# Altium PCB 175-00060, rev2, PCB, NRES RTD_TEC Board.PcbDoc (part 2 of 4)
Units mm, origin at the board's own origin, x right, y up, seen from the top; angles counter-clockwise.
Board outline 188.3 x 85 mm, 8 copper layers (Top Layer (*.GTL), MidLayer1 (*.G1), InternalPlane1 (*.GP1), InternalPlane2 (*.GP2), InternalPlane3 (*.GP3), InternalPlane4 (*.GP4), MidLayer2 (*.G2), Bottom Layer (*.GBL)), stack 1.748 mm thick; 256 components, 199 nets, 1067 pads, 575 vias.
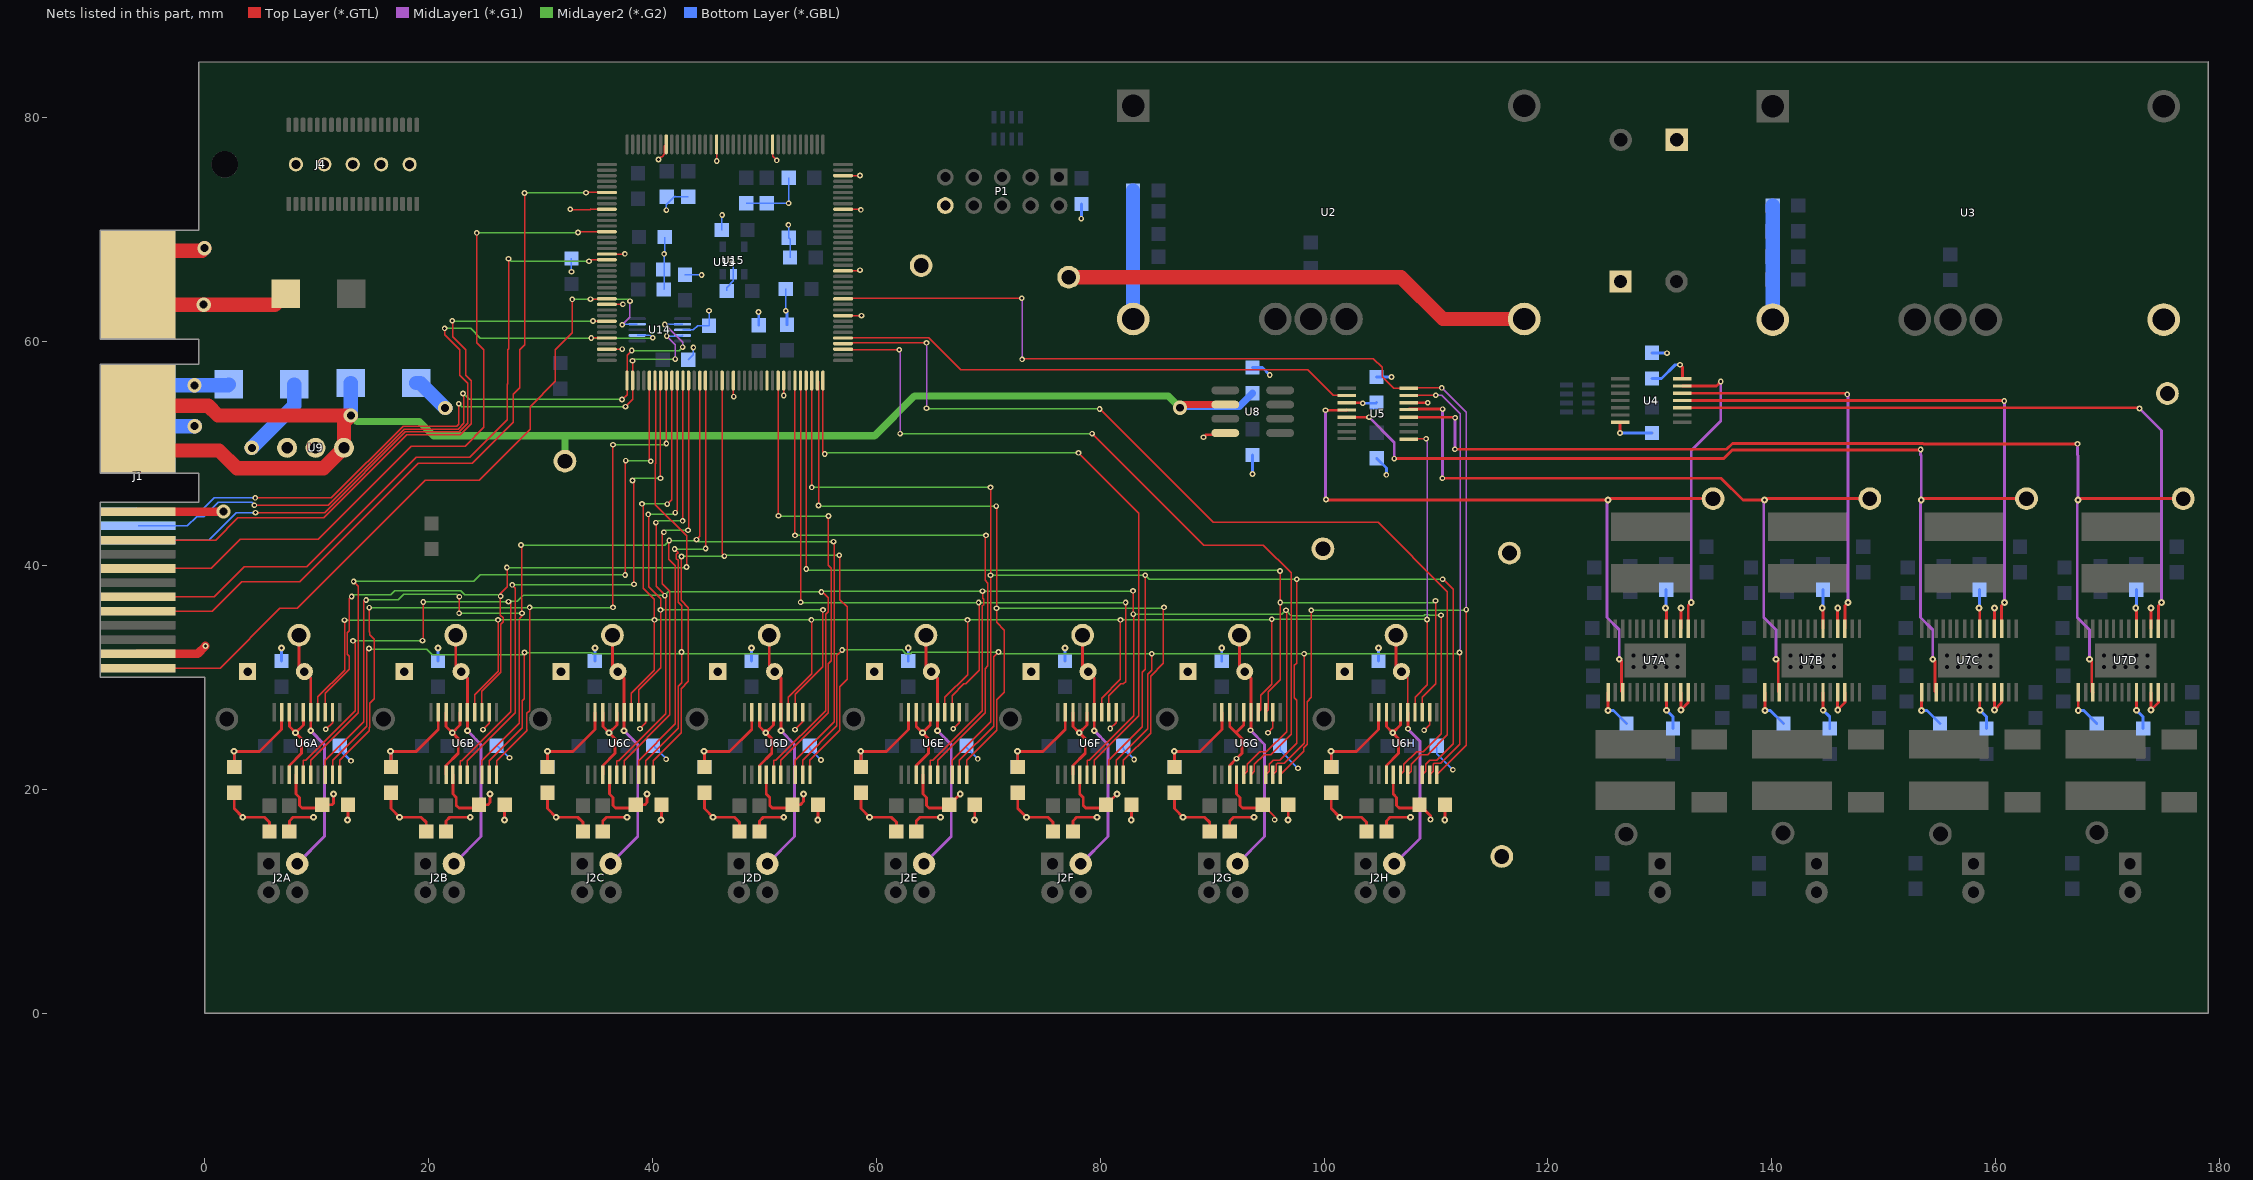
[diagram p8: the nets of this part, all layers, seen from the top]

## Via types
v1: diameter 0.508, hole 0.254, Top Layer (*.GTL) to Bottom Layer (*.GBL), tented both sides, 324 vias
v2: diameter 0.61, hole 0.254, Top Layer (*.GTL) to Bottom Layer (*.GBL), tented both sides, 234 vias
v3: diameter 1.27, hole 0.711, Top Layer (*.GTL) to Bottom Layer (*.GBL), 17 vias

## Nets (pads, with @x,y where several pads share a name; then routed paths per layer and width w, separated by ;. In a path a pad name is that pad's centre, name@x,y a point inside that pad or via, vN(x,y) a via of type N, cw(c..) or ccw(c..) an arc to the next point about the centre after c; other vN are vias at no path point) (continued)
+5ANA: C13.2 C15A.2 C15B.2 C15C.2 C15D.2 C15E.2 C15F.2 C15G.2 C15H.2 C34.POS TP7.1 U5.3 U6A.14 U6B.14 U6C.14 U6D.14 U6E.14 U6F.14 U6G.14 U6H.14 U9.3 | length 64.8
  Top Layer (*.GTL) w0.127: C15G.2@94.516,18.618 95.58,17.554 v1(95.58,17.272)
  Top Layer (*.GTL) w0.254: U6A.14@8.174,21.311 8.174,19.577 8.484,19.267 8.484,18.542 8.712,18.313 10.211,18.313 C15A.2@10.516,18.618 11.379,18.618 11.506,18.745 v2(11.506,19.583) ; U6B.14@22.174,21.311 22.174,19.577 22.484,19.267 22.484,18.542 22.712,18.313 24.211,18.313 C15B.2@24.516,18.618 25.324,18.618 25.506,18.801 v2(25.506,19.583) ; U6C.14@36.174,21.311 36.174,19.577 36.484,19.267 36.484,18.542 36.712,18.313 38.211,18.313 C15C.2@38.516,18.618 39.319,18.618 39.506,18.805 v2(39.506,19.583) ; U6D.14@50.174,21.311 50.174,19.577 50.484,19.267 50.484,18.542 50.712,18.313 52.211,18.313 C15D.2@52.516,18.618 53.213,18.618 53.506,18.911 v2(53.506,19.583) ; U6E.14@64.174,21.311 64.174,19.577 64.484,19.267 64.484,18.542 64.712,18.313 66.211,18.313 C15E.2@66.516,18.618 66.541,18.618 v2(67.506,19.583) ; U6F.14@78.174,21.311 78.174,19.577 78.484,19.267 78.484,18.542 78.712,18.313 80.211,18.313 C15F.2@80.516,18.618 80.541,18.618 v2(81.506,19.583) ; U6G.14@92.174,21.311 92.174,19.577 92.484,19.267 92.484,18.542 92.712,18.313 94.211,18.313 C15G.2@94.516,18.618 C15G.2@94.541,18.618 ; U5.3@102.006,54.523 103.414,54.523 v1(103.454,54.483) ; U6H.14@106.174,21.311 106.174,19.577 106.484,19.267 106.484,18.542 106.712,18.313 108.211,18.313 C15H.2@108.516,18.618 109.499,17.634 v1(109.499,17.297)
  Bottom Layer (*.GBL) w0.254: v1(103.454,54.483) 104.623,54.483 C13.2@104.673,54.534
  Bottom Layer (*.GBL) w1.27: v3(4.216,50.495) 8.001,54.28 C34.POS@8.001,56.159
+5VTEC1: C5.1 C12.1 C22A.2 C22B.2 C23A.2 C23B.2 C24A.2 C24B.2 TP1.1 U2.6 U4.14 U7A.1 U7A.9 U7A.11 U7A.12 U7A.18 U7A.20 U7B.1 U7B.9 U7B.11 U7B.12 U7B.18 U7B.20 | length 78.5
  Top Layer (*.GTL) w0.254: U7A.1@125.375,28.648 125.375,27.033 v2(125.377,27.031) ; v2(130.508,36.175) 130.575,36.108 U7A.20@130.575,34.348 ; U7A.9@130.575,28.648 130.575,27.065 v2(130.584,27.056) ; v1(131.801,57.912) 132.004,57.709 U4.14@132.004,56.672 ; U7A.11@131.875,28.648 v2@131.875,27.086 ; U7A.18@131.875,34.348 131.875,36.17 v2(131.88,36.175) ; v2(131.88,27.081) v2@131.875,27.086 ; U7A.12@132.525,28.648 132.525,27.736 v2@131.875,27.086 ; U7B.1@139.375,28.648 139.375,27.033 v2(139.377,27.031) ; v2(144.508,36.175) 144.575,36.108 U7B.20@144.575,34.348 ; U7B.9@144.575,28.648 144.575,27.065 v2(144.584,27.056) ; U7B.11@145.875,28.648 v2@145.875,27.086 ; U7B.18@145.875,34.348 145.875,36.17 v2(145.88,36.175) ; v2(145.88,27.081) v2@145.875,27.086 ; U7B.12@146.525,28.648 146.525,27.736 v2@145.875,27.086
  Top Layer (*.GTL) w1.27: TP1.1@77.191,65.735 106.883,65.735 110.618,62 U2.6@117.875,62
  Bottom Layer (*.GBL) w0.254: v2(125.377,27.031) 125.86,27.031 C23A.2@127.028,25.862 ; C12.1@129.286,56.693 130.15,56.693 131.369,57.912 v1(131.801,57.912) ; v2(130.508,36.175) 130.559,36.225 C22A.2@130.559,37.826 ; v2(130.584,27.056) 131.168,26.472 C24A.2@131.168,25.43 ; v2(139.377,27.031) 139.86,27.031 C23B.2@141.028,25.862 ; v2(144.508,36.175) 144.559,36.225 C22B.2@144.559,37.826 ; v2(144.584,27.056) 145.168,26.472 C24B.2@145.168,25.43
+5VTEC2: C10.1 C22C.2 C22D.2 C23C.2 C23D.2 C24C.2 C24D.2 TP3.1 U3.6 U7C.1 U7C.9 U7C.11 U7C.12 U7C.18 U7C.20 U7D.1 U7D.9 U7D.11 U7D.12 U7D.18 U7D.20 | length 31.9
  Top Layer (*.GTL) w0.254: U7C.1@153.375,28.648 153.375,27.033 v2(153.377,27.031) ; v2(158.508,36.175) 158.575,36.108 U7C.20@158.575,34.348 ; U7C.9@158.575,28.648 158.575,27.065 v2(158.584,27.056) ; U7C.11@159.875,28.648 v2@159.875,27.086 ; U7C.18@159.875,34.348 159.875,36.17 v2(159.88,36.175) ; v2(159.88,27.081) v2@159.875,27.086 ; U7C.12@160.525,28.648 160.525,27.736 v2@159.875,27.086 ; U7D.1@167.375,28.648 167.375,27.033 v2(167.377,27.031) ; v2(172.508,36.175) 172.575,36.108 U7D.20@172.575,34.348 ; U7D.9@172.575,28.648 172.575,27.065 v2(172.584,27.056) ; U7D.11@173.875,28.648 v2@173.875,27.086 ; U7D.18@173.875,34.348 173.875,36.17 v2(173.88,36.175) ; v2(173.88,27.081) v2@173.875,27.086 ; U7D.12@174.525,28.648 174.525,27.736 v2@173.875,27.086
  Bottom Layer (*.GBL) w0.254: v2(153.377,27.031) 153.86,27.031 C23C.2@155.028,25.862 ; v2(158.508,36.175) 158.559,36.225 C22C.2@158.559,37.826 ; v2(158.584,27.056) 159.168,26.472 C24C.2@159.168,25.43 ; v2(167.377,27.031) 167.86,27.031 C23D.2@169.028,25.862 ; v2(172.508,36.175) 172.559,36.225 C22D.2@172.559,37.826 ; v2(172.584,27.056) 173.168,26.472 C24D.2@173.168,25.43
+12V: C29.1 C33.POS J1.P3 TP4.1 U8.2 U9.1 | length 137.1
  Top Layer (*.GTL) w0.635: v3(87.122,54.077) 87.401,54.356 U8.2@91.174,54.356
  Top Layer (*.GTL) w1.27: J1.P3@-5.95,53.063 -3.154,50.267 1.295,50.267 2.896,48.666 10.617,48.666 U9.1@12.446,50.495 12.446,52.781 v3(13.056,53.391) 1.194,53.391 0.33,54.254 -4.759,54.254 J1.P3@-5.95,53.063
  MidLayer2 (*.G2) w0.635: v3(13.056,53.391) 13.614,52.832 19.202,52.832 20.46,51.575 32.309,51.575 ; TP4.1@32.182,49.301 32.182,51.448 32.309,51.575 ; v3(87.122,54.077) 86.081,55.118 63.398,55.118 59.855,51.575 32.309,51.575
  Bottom Layer (*.GBL) w0.635: v3@87.122,54.102 v3(87.122,54.077) 87.249,54.204 92.431,54.204 C29.1@93.599,55.372
  Bottom Layer (*.GBL) w1.27: v3(13.056,53.391) C33.POS@13.056,56.286
+24V: C1.2 C2.2 C3.2 C4.2 C6.2 C7.2 C8.2 C9.2 C43.POS J1.P4 TP2.1 U2.2 U3.2 | length 43.3
  Top Layer (*.GTL) w1.27: v3(0,68.326) -0.232,68.094 -2.921,68.094 J1.P4@-5.95,65.065 -4.166,63.28 v3(-0.085,63.28) 6.257,63.28 C43.POS@7.239,64.262
  Bottom Layer (*.GBL) w1.27: C1.2@82.931,73.482 C4.2@82.931,71.628 C3.2@82.931,69.596 C2.2@82.931,67.564 82.931,62.019 U2.2@82.95,62 ; U3.2@140.075,61.95 140.081,61.956 C6.2@140.081,65.532 C7.2@140.081,67.564 C8.2@140.081,69.85 C9.2@140.081,72.136
A: C13.1 C14A.1 C14B.1 C14C.1 C14D.1 C14E.1 C14F.1 C14G.1 C14H.1 C15A.1 C15B.1 C15C.1 C15D.1 C15E.1 C15F.1 C15G.1 C15H.1 C17A.1 C17B.1 C17C.1 C17D.1 C17E.1 C17F.1 C17G.1 C17H.1 C19A.1 C19B.1 C19C.1 C19D.1 C19E.1 C19F.1 C19G.1 C19H.1 C20A.1 C20B.1 C20C.1 C20D.1 C20E.1 C20F.1 C20G.1 C20H.1 C29.2 C30.2 C31.2 C33.NEG C34.NEG J1.P1 R6A.1 R6B.1 R6C.1 R6D.1 R6E.1 R6F.1 R6G.1 R6H.1 TP10.1 TP11.1 U5.14 U6A.6 U6A.8 U6A.13 U6B.6 U6B.8 U6B.13 U6C.6 U6C.8 U6C.13 U6D.6 U6D.8 U6D.13 U6E.6 U6E.8 U6E.13 U6F.6 U6F.8 U6F.13 U6G.6 U6G.8 U6G.13 U6H.6 U6H.8 U6H.13 U8.4 U9.2 | length 191.4
  Top Layer (*.GTL) w0.254: C14A.1@2.642,19.685 2.642,18.263 v2(3.404,17.501) 5.334,17.501 5.791,17.043 C17A.1@5.791,16.231 ; C19A.1@7.569,16.231 7.569,17.17 7.899,17.501 v2(9.728,17.501) ; U6A.13@7.574,21.311 7.574,22.128 8.661,23.216 8.661,24.511 v2(8.128,25.044) ; U6A.8@7.574,26.861 7.574,25.598 v2(8.128,25.044) ; U6A.6@8.824,26.861 8.824,25.741 v2(8.128,25.044) ; v2(12.776,17.247) 12.802,17.272 C15A.1@12.802,18.618 ; C14B.1@16.642,19.685 16.642,18.263 v2(17.404,17.501) 19.334,17.501 19.791,17.043 C17B.1@19.791,16.231 ; C19B.1@21.569,16.231 21.569,17.17 21.899,17.501 v2(23.728,17.501) ; U6B.13@21.574,21.311 21.574,22.128 22.661,23.216 22.661,24.511 v2(22.128,25.044) ; U6B.8@21.574,26.861 21.574,25.598 v2(22.128,25.044) ; U6B.6@22.824,26.861 22.824,25.741 v2(22.128,25.044) ; v2(26.776,17.247) 26.802,17.272 C15B.1@26.802,18.618 ; C14C.1@30.642,19.685 30.642,18.263 v2(31.404,17.501) 33.334,17.501 33.791,17.043 C17C.1@33.791,16.231 ; C19C.1@35.569,16.231 35.569,17.17 35.899,17.501 v2(37.728,17.501) ; U6C.13@35.574,21.311 35.574,22.128 36.661,23.216 36.661,24.511 v2(36.128,25.044) ; U6C.8@35.574,26.861 35.574,25.598 v2(36.128,25.044) ; U6C.6@36.824,26.861 36.824,25.741 v2(36.128,25.044) ; v2(40.776,17.247) 40.802,17.272 C15C.1@40.802,18.618 ; C14D.1@44.642,19.685 44.642,18.263 v2(45.404,17.501) 47.334,17.501 47.791,17.043 C17D.1@47.791,16.231 ; C19D.1@49.569,16.231 49.569,17.17 49.899,17.501 v2(51.728,17.501) ; U6D.13@49.574,21.311 49.574,22.128 50.661,23.216 50.661,24.511 v2(50.128,25.044) ; U6D.8@49.574,26.861 49.574,25.598 v2(50.128,25.044) ; U6D.6@50.824,26.861 50.824,25.741 v2(50.128,25.044) ; v2(54.776,17.247) 54.802,17.272 C15D.1@54.802,18.618 ; C14E.1@58.642,19.685 58.642,18.263 v2(59.404,17.501) 61.334,17.501 61.791,17.043 C17E.1@61.791,16.231 ; C19E.1@63.569,16.231 63.569,17.17 63.899,17.501 v2(65.728,17.501) ; U6E.13@63.574,21.311 63.574,22.128 64.661,23.216 64.661,24.511 v2(64.128,25.044) ; U6E.8@63.574,26.861 63.574,25.598 v2(64.128,25.044) ; U6E.6@64.824,26.861 64.824,25.741 v2(64.128,25.044) ; v2(68.776,17.247) 68.802,17.272 C15E.1@68.802,18.618 ; C14F.1@72.642,19.685 72.642,18.263 v2(73.404,17.501) 75.334,17.501 75.791,17.043 C17F.1@75.791,16.231 ; C19F.1@77.569,16.231 77.569,17.17 77.899,17.501 v2(79.728,17.501) ; U6F.13@77.574,21.311 77.574,22.128 78.661,23.216 78.661,24.511 v2(78.128,25.044) ; U6F.8@77.574,26.861 77.574,25.598 v2(78.128,25.044) ; U6F.6@78.824,26.861 78.824,25.741 v2(78.128,25.044) ; v2(82.776,17.247) 82.802,17.272 C15F.1@82.802,18.618 ; C14G.1@86.642,19.685 86.642,18.263 v2(87.404,17.501) 89.334,17.501 89.791,17.043 C17G.1@89.791,16.231 ; v1(89.23,51.435) 89.459,51.664 91.022,51.664 U8.4@91.174,51.816 ; C19G.1@91.569,16.231 91.569,17.17 91.899,17.501 v2(93.728,17.501) ; U6G.13@91.574,21.311 91.574,22.128 v1(92.178,22.732) 92.661,23.216 92.661,24.511 92.128,25.044 ; U6G.8@91.574,26.861 91.574,25.598 92.128,25.044 ; U6G.6@92.824,26.861 92.824,25.741 92.128,25.044 ; v2(96.776,17.247) 96.802,17.272 C15G.1@96.802,18.618 ; C14H.1@100.642,19.685 100.642,18.263 v2(101.404,17.501) 103.334,17.501 103.791,17.043 C17H.1@103.791,16.231 ; C19H.1@105.569,16.231 105.569,17.17 105.899,17.501 v2(107.728,17.501) ; U6H.13@105.574,21.311 105.574,22.128 106.661,23.216 106.661,24.511 v2(106.128,25.044) ; U6H.8@105.574,26.861 105.574,25.598 v2(106.128,25.044) ; U6H.6@106.824,26.861 106.824,25.741 v2(106.128,25.044) ; U5.14@107.556,54.523 v1(109.256,54.523) ; v2(110.776,17.247) 110.802,17.272 C15H.1@110.802,18.618
  Bottom Layer (*.GBL) w0.254: J1.P1@-5.95,53.063 J1.P1@-5.95,54.375 ; C20A.1@6.858,31.445 v2(6.858,32.614) ; C20B.1@20.858,31.445 v2(20.858,32.614) ; C20C.1@34.858,31.445 v2(34.858,32.614) ; C20D.1@48.858,31.445 v2(48.858,32.614) ; C20E.1@62.858,31.445 v2(62.858,32.614) ; C20F.1@76.858,31.445 v2(76.858,32.614) ; C20G.1@90.858,31.445 v2(90.858,32.614) ; v1(93.599,48.158) C30.2@93.599,49.86 ; C29.2@93.599,57.658 94.488,57.658 v1(95.148,56.998) ; C13.1@104.673,56.82 v1(106.02,56.82) ; C31.2@104.699,49.555 105.562,48.692 v1(105.562,48.082) ; C20H.1@104.858,31.445 v2(104.858,32.614)
  Bottom Layer (*.GBL) w1.27: J1.P1@-5.95,53.063 -5.313,52.426 v3(-0.889,52.426) ; J1.P1@-5.95,54.375 -4.242,56.083 v3(-0.914,56.083) 2.083,56.083 C34.NEG@2.159,56.159 ; C33.NEG@18.898,56.286 19.253,56.286 v3(21.488,54.051)
ACLOCK_0: J1.S10 U13.32 U14.7 | length 64.9
  Top Layer (*.GTL) w0.127: v1(4.547,44.704) 10.726,44.704 17.94,51.918 22.74,51.918 23.52,52.698 23.52,56.261 22.796,56.985 22.796,59.258 21.463,60.592 v1@21.463,61.163 ; v1(34.544,60.3) 34.55,60.306 U13.32@35.932,60.306
  MidLayer2 (*.G2) w0.127: v1(21.438,61.163) 23.774,61.163 24.638,60.3 v1(34.544,60.3) 40.005,60.3 v1(40.03,60.325)
  Bottom Layer (*.GBL) w0.127: J1.S10@-5.95,42.255 0.371,42.255 2.819,44.704 v1(4.547,44.704) ; U14.7@38.64,60.536 39.819,60.536 v1(40.03,60.325)
ACLOCK_1: J1.S11 U13.37 U14.2 | length 63.9
  Top Layer (*.GTL) w0.127: v1(4.445,45.364) 11.027,45.364 17.834,52.172 22.635,52.172 23.165,52.701 v1@23.165,55.353 ; v1(37.287,54.813) 37.732,55.258 U13.37@37.732,56.506 37.732,58.763 v1(38.151,59.182)
  MidLayer1 (*.G1) w0.127: v1(41.097,61.519) 42.697,59.919 v1(42.697,59.487)
  MidLayer2 (*.G2) w0.127: v1(23.076,55.353) 23.108,55.353 23.647,54.813 v1(37.287,54.813) ; v1(38.151,59.182) 42.393,59.182 v1(42.697,59.487)
  Bottom Layer (*.GBL) w0.127: J1.S11@-5.95,43.525 -1.534,43.525 -0.709,44.351 -0.074,44.351 1.196,45.621 4.188,45.621 v1(4.445,45.364) ; v1(41.097,61.519) 42.673,61.519 U14.2@42.69,61.536
ACLOCK_2: J1.S12 U13.38 U14.4 | length 60.8
  Top Layer (*.GTL) w0.127: v1(4.521,46.025) 11.328,46.025 17.729,52.426 22.53,52.426 22.708,52.603 v1(22.708,54.432) ; v1(37.592,54.178) 38.232,54.818 U13.38@38.232,56.506 38.232,58.263 v1(38.227,58.268)
  MidLayer1 (*.G1) w0.127: v1(41.275,60.477) 42.037,59.715 v1(42.037,58.42)
  MidLayer2 (*.G2) w0.127: v1(22.708,54.432) 22.962,54.178 v1(37.592,54.178) ; v1(38.227,58.268) 38.367,58.407 42.024,58.407 v1(42.037,58.42)
  Bottom Layer (*.GBL) w0.127: J1.S12@-5.95,44.795 -0.391,44.795 0.838,46.025 v1(4.521,46.025) ; v1(41.275,60.477) 42.632,60.477 U14.4@42.69,60.536
ACLOCK_3: J1.S13 U13.25 U14.9 | length 67.5
  Top Layer (*.GTL) w0.127: J1.S13@-5.95,30.825 1.387,30.825 6.706,36.144 8.273,36.144 19.728,47.6 24.529,47.6 29.083,52.154 29.083,54.178 31.331,56.426 31.331,59.258 32.842,60.77 v1(32.842,63.754) ; v1(34.468,63.779) 35.905,63.779 U13.25@35.932,63.806
  MidLayer1 (*.G1) w0.127: v1(37.313,61.493) 37.998,62.179 v1(37.998,63.602)
  MidLayer2 (*.G2) w0.127: v1(32.842,63.754) 34.442,63.754 v1(34.468,63.779) 37.821,63.779 v1(37.998,63.602)
  Bottom Layer (*.GBL) w0.127: v1(37.313,61.493) 37.355,61.536 U14.9@38.64,61.536
ADC_CLK_A: U6A.3 U6B.3 U13.42 | length 73.5
  Top Layer (*.GTL) w0.127: U6A.3@10.774,26.861 10.774,28.554 12.941,30.721 12.941,31.863 12.758,32.046 12.758,33.962 12.941,34.146 12.941,35.287 12.929,35.3 12.929,37.008 v1(13.132,37.211) ; U6B.3@24.774,26.861 24.774,28.737 26.467,30.429 26.467,34.754 26.657,34.944 26.657,35.312 26.416,35.554 26.416,37.446 27.038,38.068 27.038,39.764 v1(27,39.802) ; U13.42@40.232,56.506 40.297,56.441 40.297,49.117 40.272,49.092 40.272,45.409 43.053,42.628 v1(43.053,39.853)
  MidLayer2 (*.G2) w0.127: v1(13.132,37.211) 13.284,37.363 16.605,37.363 16.986,37.744 22.866,37.744 23.247,37.363 26.568,37.363 v1(26.441,37.236) ; v1(27,39.802) 43.002,39.802 v1(43.053,39.853)
ADC_CLK_B: U6C.3 U6D.3 U13.46 | length 58
  Top Layer (*.GTL) w0.127: U6C.3@38.774,26.861 38.774,28.868 40.742,30.836 40.742,37.033 39.675,38.1 39.675,44.501 v1(39.624,44.552) ; v1(42.037,44.704) 42.232,44.899 U13.46@42.232,56.506 ; U6D.3@52.774,26.861 52.774,27.757 52.781,27.764 52.781,28.499 55.22,30.937 55.22,35.992 v1(55.245,36.017)
  MidLayer2 (*.G2) w0.127: v1(39.624,44.552) 41.885,44.552 v1(42.037,44.704) ; v1(40.716,36.017) v1(55.245,36.017)
ADC_CLK_C: U6E.3 U6F.3 U13.68 | length 70.4
  Top Layer (*.GTL) w0.127: v1(53.238,36.703) U13.68@53.238,56.5 ; U6E.3@66.774,26.861 66.774,28.366 67.834,29.426 68.006,29.426 69.19,30.609 69.19,36.627 v1(69.139,36.678) ; U6F.3@80.774,26.861 80.774,28.366 81.834,29.426 82.082,29.426 82.271,29.614 v1(82.271,36.678)
  MidLayer2 (*.G2) w0.127: v1(53.238,36.703) 53.264,36.678 v1(69.139,36.678) v1(82.271,36.678)
ADC_CLK_D: U6G.3 U6H.3 U13.69 | length 96.8
  Top Layer (*.GTL) w0.127: v1(53.746,39.675) U13.69@53.746,56.492 ; U6G.3@94.774,26.861 95.003,27.089 95.003,28.683 96.088,29.769 v1(96.088,36.678) 96.088,39.472 v1(96.063,39.497) ; U6H.3@108.774,26.861 108.774,28.219 109.957,29.402 v1(109.957,36.83)
  MidLayer2 (*.G2) w0.127: v1(53.746,39.675) 53.861,39.56 95.999,39.56 v1(96.063,39.497) ; v1(96.088,36.678) 109.804,36.678 v1(109.957,36.83)
ADC_CS_0: U6A.16 U13.41 | length 63.4
  Top Layer (*.GTL) w0.127: U6A.16@9.474,21.311 9.474,22.581 13.716,26.822 13.716,38.151 v1(13.31,38.557) ; v1(37.567,39.141) 37.567,49.301 v1(37.617,49.352) ; U13.41@39.732,56.506 39.732,49.422 v1(39.853,49.301)
  MidLayer2 (*.G2) w0.127: v1(13.31,38.557) 24.028,38.557 24.613,39.141 v1(37.567,39.141) ; v1(37.617,49.352) 39.802,49.352 v1(39.853,49.301)
ADC_CS_1: U6B.16 U13.43 | length 50.4
  Top Layer (*.GTL) w0.127: U6B.16@23.474,21.311 23.474,22.53 27.762,26.818 27.762,37.973 v1(27.483,38.252) ; v1(38.227,47.574) 38.354,47.447 v1(38.354,38.303) ; v1(40.716,47.777) 40.716,56.49 U13.43@40.732,56.506
  MidLayer2 (*.G2) w0.127: v1(27.483,38.252) 38.354,38.252 v1(38.354,38.303) ; v1(38.227,47.574) 38.43,47.777 v1(40.716,47.777)
ADC_CS_2: U6C.16 U13.48 | length 39.4
  Top Layer (*.GTL) w0.127: U6C.16@37.474,21.311 37.474,22.555 41.554,26.635 41.554,37.694 40.894,38.354 40.894,42.951 v1(41.021,42.951) ; v1(43.18,43.129) 43.232,43.181 U13.48@43.232,56.506
  MidLayer2 (*.G2) w0.127: v1(41.021,42.951) 41.199,43.129 v1(43.18,43.129)
ADC_CS_3: U6D.16 U13.64 | length 41.6
  Top Layer (*.GTL) w0.127: U13.64@51.232,56.506 51.257,56.481 v1(51.257,44.425) ; U6D.16@51.474,21.311 51.474,22.581 55.728,26.834 55.728,31.225 55.982,31.479 55.982,39.754 55.728,40.008 v1(55.728,44.399)
  MidLayer2 (*.G2) w0.127: v1(51.257,44.425) 51.283,44.399 v1(55.728,44.399)
ADC_CS_4: U6E.16 U13.67 | length 54.3
  Top Layer (*.GTL) w0.127: v1(52.73,42.672) 52.73,56.504 U13.67@52.732,56.506 ; U6E.16@65.474,21.311 65.474,22.581 69.723,26.829 69.723,30.771 69.977,31.025 69.977,38.4 69.723,38.654 69.723,42.596 v1(69.799,42.672)
  MidLayer2 (*.G2) w0.127: v1(52.73,42.672) v1(69.799,42.672)
ADC_CS_5: U6F.16 U13.72 | length 61.9
  Top Layer (*.GTL) w0.127: U13.72@55.232,56.506 55.232,50.102 v1(55.397,49.936) ; v1(78.06,50.043) 83.439,44.664 83.439,26.545 79.474,22.581 U6F.16@79.474,21.311
  MidLayer2 (*.G2) w0.127: v1(55.397,49.936) 55.504,50.043 v1(78.06,50.043)
ADC_CS_6: U6G.16 U13.75 | length 72.5
  Top Layer (*.GTL) w0.127: U13.75@57.032,59.306 57.08,59.258 v1(62.052,59.258) ; v1(79.284,51.762) 89.238,41.808 94.575,41.808 97.053,39.33 97.053,24.89 95.252,23.088 94.657,23.088 93.784,22.214 93.784,21.62 U6G.16@93.474,21.311
  MidLayer1 (*.G1) w0.127: v1(62.052,59.258) 62.128,59.182 v1(62.128,51.765)
  MidLayer2 (*.G2) w0.127: v1(62.128,51.765) 62.132,51.762 v1(79.284,51.762)
ADC_CS_7: U6H.16 U13.76 | length 84.9
  Top Layer (*.GTL) w0.127: U13.76@57.032,59.806 57.094,59.868 v1(64.491,59.868) ; v1(64.491,54.026) v1@64.549,53.968 ; v1(79.952,53.968) 90.079,43.84 104.837,43.84 111.023,37.654 111.023,24.86 109.252,23.088 108.657,23.088 107.784,22.215 107.784,21.62 U6H.16@107.474,21.311
  MidLayer1 (*.G1) w0.127: v1(64.491,54.026) v1(64.491,59.868)
  MidLayer2 (*.G2) w0.127: v1(64.491,54.026) 64.549,53.968 v1(79.952,53.968)
ADC_START: U6A.15 U6B.15 U6C.15 U6D.15 U6E.15 U6F.15 U6G.15 U6H.15 U13.47 | length 261.1
  Top Layer (*.GTL) w0.127: U6A.15@8.824,21.311 8.824,22.581 9.039,22.581 13.462,27.004 13.462,33.045 v1(13.259,33.249) ; v1(19.456,33.274) 19.533,33.35 v1(19.533,36.728) ; U6B.15@22.824,21.311 22.824,22.53 22.988,22.53 27.356,26.898 27.356,36.551 v1(27.153,36.754) ; U6C.15@36.824,21.311 36.824,22.555 37.013,22.555 41.199,26.741 41.199,37.205 v1(41.11,37.294) ; v1(40.31,43.815) 40.335,43.79 40.335,38.151 v1@41.151,37.335 ; v1(42.697,43.967) 42.697,56.471 U13.47@42.732,56.506 ; U6D.15@50.824,21.311 50.824,22.581 51.039,22.581 55.474,27.016 55.474,35.617 55.689,35.833 55.689,37.122 55.194,37.617 v1(55.093,37.617) ; U6E.15@64.824,21.311 64.824,22.581 65.039,22.581 69.469,27.011 69.469,36.379 69.583,36.493 69.583,36.976 69.494,37.065 v1(69.494,37.694) ; U6F.15@78.824,21.311 78.824,22.581 79.039,22.581 83.007,26.549 v1@83.007,35.636 ; v1(82.931,37.719) 82.956,37.694 v1(82.956,35.636) ; U6G.15@92.824,21.311 93.134,21.62 93.134,22.214 94.261,23.342 94.856,23.342 96.647,25.133 96.647,35.966 96.622,35.992 v1(96.596,35.992) ; U6H.15@106.824,21.311 107.134,21.62 107.134,22.215 108.261,23.342 108.856,23.342 110.465,24.951 v1@110.465,35.535
  MidLayer2 (*.G2) w0.127: v1(13.259,33.249) 19.431,33.249 v1(19.456,33.274) ; v1@19.558,36.754 v1(19.533,36.728) 27.127,36.728 v1(27.153,36.754) 27.178,36.779 27.915,36.779 28.454,37.319 v1@41.135,37.319 ; v1(40.31,43.815) 40.462,43.967 v1(42.697,43.967) ; v1(41.11,37.294) v1@41.135,37.319 ; v1(82.931,37.719) 82.906,37.694 v1(69.494,37.694) 55.169,37.694 v1(55.093,37.617) 41.434,37.617 v1@41.135,37.319 ; v1(82.956,35.636) 96.241,35.636 v1(96.596,35.992) 97.079,35.509 108.922,35.509 109.01,35.598 109.379,35.598 109.417,35.56 110.414,35.56 v1(110.439,35.535)
D: C11.2 C12.2 C16A.1 C16B.1 C16C.1 C16D.1 C16E.1 C16F.1 C16G.1 C16H.1 C32.1 C37.1 C38.1 C39.1 C40.1 C41.1 C42.1 C44.1 C46.1 C47.1 C48.1 C49.1 C50.1 C51.1 C52.1 C53.1 C54.1 C55.1 C56.1 J1.S14 J1.S24 J4.0 P1.10 R10.2 U4.7 U6A.2 U6B.2 U6C.2 U6D.2 U6E.2 U6F.2 U6G.2 U6H.2 U13.9 U13.17 U13.26 U13.34 U13.56 U13.65 U13.81 U13.89 U13.100 U13.106 U13.118 U13.128 U13.137 U14.3 U15.2 | length 104.7
  Top Layer (*.GTL) w0.127: v1(10.82,25.349) 11.424,25.953 U6A.2@11.424,26.861 ; v1(24.867,25.324) 25.424,25.881 U6B.2@25.424,26.861 ; v1(32.664,71.806) 32.703,71.768 34.48,71.768 34.493,71.755 34.493,71.806 34.519,71.831 34.544,71.806 U13.9@35.932,71.806 ; U13.34@35.932,59.306 37.31,59.306 v1(37.313,59.309) ; U13.26@35.932,63.306 37.347,63.306 v1(37.363,63.322) ; U13.17@35.932,67.806 37.529,67.806 v1(37.541,67.818) ; v1(38.887,25.4) 39.424,25.937 U6C.2@39.424,26.861 ; v1(40.538,76.251) 40.803,76.516 40.873,76.516 41.073,76.715 41.073,77.447 U13.137@41.232,77.606 ; U13.128@45.732,77.606 45.732,76.137 v1(45.745,76.124) ; U13.56@47.232,56.506 47.232,55.105 v1(47.269,55.067) ; U13.118@50.732,77.606 50.732,76.547 v1(51.105,76.175) ; U13.65@51.732,56.506 51.732,55.177 v1(51.74,55.169) ; v1(52.73,25.324) 53.424,26.017 U6D.2@53.424,26.861 ; U13.81@57.032,62.306 v1(58.674,62.306) ; U13.89@57.032,66.306 58.483,66.306 v1(58.547,66.37) ; U13.100@57.032,71.806 58.572,71.806 v1(58.623,71.755) ; U13.106@57.032,74.806 58.525,74.806 v1(58.547,74.828) ; v1(66.878,25.4) 67.424,25.946 U6E.2@67.424,26.861 ; v1(80.899,25.425) 81.424,25.951 U6F.2@81.424,26.861 ; v1(94.996,25.044) 95.424,25.472 U6G.2@95.424,26.861 ; v1(108.941,25.273) 109.424,25.757 U6H.2@109.424,26.861
  Top Layer (*.GTL) w0.254: v1(126.441,51.816) 126.441,52.759 U4.7@126.454,52.772
  Top Layer (*.GTL) w0.762: J1.S14@-5.95,32.095 -0.62,32.095 v1(0.076,32.791) ; J1.S24@-5.95,44.795 v3(1.692,44.795) v3@1.727,44.831
  Bottom Layer (*.GBL) w0.127: C16B.1@26.065,23.876 26.162,23.876 v1(27.229,22.809) ; v1(32.766,66.218) C51.1@32.766,67.412 ; C16C.1@40.065,23.876 41.224,22.717 v1(41.224,22.682) ; C52.1@41.021,64.643 41.046,64.668 v1(41.046,67.818) 41.097,67.869 C53.1@41.097,69.317 ; v1(41.25,71.73) 41.25,72.212 42.012,72.974 42.062,72.923 C48.1@43.205,72.923 ; U14.3@42.69,61.036 43.663,61.036 44.044,61.417 45.034,61.417 C42.1@45.06,61.392 v1(45.06,62.738) ; R10.2@42.901,65.964 44.374,65.964 v1(44.399,65.938) ; C37.1@43.205,58.369 43.663,58.826 v1(43.663,59.461) ; C38.1@46.203,69.952 46.203,71.272 v1(46.228,71.298) ; C39.1@46.634,64.516 46.634,64.795 47.244,65.405 U15.2@47.244,66.009 47.244,66.98 v1(47.142,67.081) ; C40.1@48.387,72.339 C47.1@50.216,72.339 v1(52.172,72.339) C46.1@52.172,74.625 ; C54.1@51.918,64.694 v1(51.918,62.738) v1@52.019,62.636 ; v1(52.146,70.409) 52.172,70.383 C50.1@52.172,69.266 52.299,69.139 C41.1@52.299,67.488 ; C16D.1@54.065,23.876 54.065,23.608 v1(55.067,22.606) ; C16E.1@68.065,23.876 68.065,23.705 v1(69.063,22.708) ; C16F.1@82.065,23.876 82.065,23.624 v1(83.033,22.657) ; C16G.1@96.065,23.876 96.065,23.467 v1(97.663,21.869) ; C16H.1@110.065,23.876 110.065,23.183 v1(111.506,21.742)
  Bottom Layer (*.GBL) w0.254: C16A.1@12.065,23.876 12.065,23.546 v1(13.081,22.53) ; v1(49.479,62.636) 49.505,62.611 C56.1@49.505,61.443 ; C55.1@52.019,61.493 v1@52.019,62.636 ; v1(78.308,70.968) 78.334,70.993 C32.1@78.334,72.288 ; v1(126.441,51.816) C11.2@129.286,51.816 ; C12.2@129.286,58.979 130.607,58.979 v1(130.632,58.953)
DAC_CS: U5.2 U13.77 | length 47.1
  Top Layer (*.GTL) w0.127: U13.77@57.032,60.306 57.038,60.312 64.675,60.312 67.532,57.455 98.531,57.455 100.813,55.173 U5.2@102.006,55.173
DACOUT_0: TP9A.1 U5.4 U7A.3 | length 62.2
  Top Layer (*.GTL) w0.254: v1(100.127,53.848) 101.981,53.848 U5.4@102.006,53.873 ; v1@100.33,45.827 v2(125.352,45.827) 125.479,45.954 TP9A.1@134.75,45.954 ; v2(126.368,31.603) 126.444,31.603 126.571,31.476 126.571,28.753 U7A.3@126.675,28.648
  MidLayer1 (*.G1) w0.254: v1(100.127,53.848) 100.127,45.923 v1(100.178,45.872) ; v2(125.352,45.827) 125.276,45.75 125.276,35.336 126.368,34.244 v2(126.368,31.603)
DACOUT_1: TP9B.1 U5.13 U7B.3 | length 66.1
  Top Layer (*.GTL) w0.254: U5.13@107.556,53.923 107.583,53.95 v1(110.592,53.95) ; v1(110.566,47.777) 135.458,47.777 137.409,45.827 v2(139.352,45.827) 139.479,45.954 TP9B.1@148.75,45.954 ; v2(140.368,31.603) 140.444,31.603 140.571,31.476 140.571,28.753 U7B.3@140.675,28.648
  MidLayer1 (*.G1) w0.254: v1(110.566,47.777) 110.566,53.924 v1(110.592,53.95) ; v2(139.352,45.827) 139.276,45.75 139.276,35.336 140.368,34.244 v2(140.368,31.603)
DACOUT_2: TP9C.1 U5.5 U7C.3 | length 85.8
  Top Layer (*.GTL) w0.254: U5.5@102.006,53.223 103.998,53.223 v1(104.013,53.238) ; v1(106.274,49.53) 135.698,49.53 136.463,50.295 153.242,50.295 v1(153.289,50.343) ; v2(153.352,45.827) 153.479,45.954 TP9C.1@162.75,45.954 ; v2(154.368,31.603) 154.444,31.603 154.571,31.476 154.571,28.753 U7C.3@154.675,28.648
  MidLayer1 (*.G1) w0.254: v1(104.013,53.238) 106.274,50.978 v1(106.274,49.53) ; v1(153.289,50.343) 153.289,49.877 153.352,49.814 v2(153.352,45.827) 153.276,45.75 153.276,35.336 154.368,34.244 v2(154.368,31.603)
DACOUT_3: TP9D.1 U5.12 U7D.3 | length 95.2
  Top Layer (*.GTL) w0.254: U5.12@107.556,53.223 111.673,53.223 v1(111.709,53.188) ; v1(111.684,50.368) 135.961,50.368 136.469,50.876 153.51,50.876 153.535,50.851 v1(167.31,50.851) ; v2(167.352,45.827) 167.479,45.954 TP9D.1@176.75,45.954 ; v2(168.368,31.603) 168.444,31.603 168.571,31.476 168.571,28.753 U7D.3@168.675,28.648
  MidLayer1 (*.G1) w0.254: v1(111.684,50.368) 111.709,50.394 v1(111.709,53.188) ; v1(167.31,50.851) 167.31,49.856 167.352,49.814 v2(167.352,45.827) 167.276,45.75 167.276,35.336 168.368,34.244 v2(168.368,31.603)
DEV_RST: U5.9 U6A.4 U6B.4 U6C.4 U6D.4 U6E.4 U6F.4 U6G.4 U6H.4 U13.45 | length 211.1
  Top Layer (*.GTL) w0.127: U6A.4@10.124,26.861 10.124,28.263 12.497,30.636 v1(12.497,35.103) ; U6B.4@24.124,26.861 24.124,28.446 26.213,30.534 v1@26.213,35.103 ; U6C.4@38.124,26.861 38.124,28.577 40.157,30.611 40.157,36.982 39.167,37.973 39.167,45.39 v1(39.065,45.491) ; v1(41.326,45.466) 41.732,45.872 U13.45@41.732,56.506 ; U6D.4@52.124,26.861 52.124,27.757 52.131,27.764 52.131,28.208 54.254,30.331 v1@54.254,35.128 ; U6E.4@66.124,26.861 66.124,28.194 68.148,30.218 v1(68.148,35.128) ; U6F.4@80.124,26.861 80.124,28.118 81.813,29.807 v1(81.813,35.128) ; U6G.4@94.124,26.861 94.342,27.079 94.342,28.382 95.326,29.366 v1(95.326,35.179) ; U5.9@107.556,51.273 107.591,51.308 v1(109.118,51.308) ; U6H.4@108.124,26.861 108.124,28.219 109.22,29.315 v1@109.22,35.154
  MidLayer1 (*.G1) w0.127: v1(109.118,51.308) 109.195,51.232 v1(109.195,35.154)
  MidLayer2 (*.G2) w0.127: v1(12.497,35.103) 26.187,35.103 v1(26.213,35.128) v1(40.183,35.128) v1(54.204,35.128) v1(68.148,35.128) v1(81.813,35.128) 95.275,35.128 v1(95.326,35.179) 109.169,35.179 v1(109.195,35.154) ; v1(39.065,45.491) 41.351,45.491 v1(41.326,45.466)
DEV_SCLK_A: U6A.20 U6B.20 U13.44 | length 79.3
  Top Layer (*.GTL) w0.127: U6A.20@12.074,21.311 12.074,22.581 14.707,25.213 14.707,25.504 14.732,25.529 14.732,27.657 15.138,28.063 15.138,33.376 14.732,33.782 14.732,34.04 14.707,34.065 v1(14.707,36.22) ; U6B.20@26.074,21.311 26.074,22.548 28.801,25.275 28.775,25.302 28.775,26.763 29.032,27.021 v1(29.032,36.246) ; v1(36.474,36.246) v1(36.474,50.775) ; v1(41.25,50.876) U13.44@41.25,56.488
  MidLayer2 (*.G2) w0.127: v1(14.707,36.22) 36.449,36.22 v1(36.474,36.246) ; v1(36.474,50.775) 41.148,50.775 v1(41.25,50.876)
DEV_SCLK_B: U6C.20 U6D.20 U13.54 | length 72.1
  Top Layer (*.GTL) w0.127: U6C.20@40.074,21.311 40.074,22.555 42.57,25.051 42.57,28.987 43.205,29.622 43.205,36.222 42.57,36.857 42.57,40.792 v1(42.596,40.792) ; U13.54@46.232,56.506 46.232,41.017 v1(46.431,40.818) ; U6D.20@54.074,21.311 54.074,22.581 56.744,25.25 56.744,29.148 57.404,29.809 57.404,36.285 56.744,36.945 56.744,40.843 v1(56.693,40.894)
  MidLayer2 (*.G2) w0.127: v1(42.596,40.792) 46.406,40.792 v1(46.431,40.818) ; v1@46.507,40.894 v1(56.693,40.894)
DEV_SCLK_C: U6E.20 U6F.20 U13.71 | length 84.2
  Top Layer (*.GTL) w0.127: U13.71@54.732,56.506 54.839,56.399 v1(54.839,45.339) ; U6E.20@68.074,21.311 68.074,22.581 70.739,25.245 70.739,27.977 71.425,28.662 71.425,34.214 70.739,34.9 v1(70.739,36.17) 70.739,45.263 v1(70.714,45.288) ; U6F.20@82.074,21.311 82.074,22.581 84.506,25.012 84.506,30.094 85.649,31.237 v1@85.649,36.246
  MidLayer2 (*.G2) w0.127: v1(54.839,45.339) 54.889,45.288 v1(70.714,45.288) ; v1(70.739,36.17) 85.623,36.17 v1(85.7,36.246)
DEV_SCLK_D: U5.16 U6G.20 U6H.20 U13.84 | length 126.7
  Top Layer (*.GTL) w0.127: U13.84@57.082,63.856 v1(73,63.856) ; v1(73.025,58.395) 73.101,58.471 104.401,58.471 105.181,57.691 105.181,56.865 106.223,55.823 U5.16@107.556,55.823 ; U6G.20@96.074,21.311 98.171,23.407 98.171,23.698 98.476,24.003 98.476,27.824 98.857,28.205 v1(98.857,35.992) ; U5.16@107.588,55.855 v1(110.515,55.855) ; U6H.20@110.074,21.311 112.7,23.936 v1(112.7,36.043)
  MidLayer1 (*.G1) w0.127: v1(73,63.856) 73.025,63.83 v1(73.025,58.395) ; v1(110.515,55.855) 112.7,53.67 v1(112.7,36.043)
  MidLayer2 (*.G2) w0.127: v1(98.857,35.992) 112.649,35.992 v1(112.7,36.043)
DIN_A: U6A.18 U6B.18 U6C.18 U6D.18 U13.50 | length 142.1
  Top Layer (*.GTL) w0.127: U6A.18@10.774,21.311 10.774,22.581 14.224,26.03 14.224,36.779 14.351,36.906 v1(14.427,36.906) ; v1(22.733,35.712) 22.758,35.712 v1(22.758,37.186) ; U6B.18@24.774,21.311 24.774,22.53 28.118,25.873 28.118,35.103 ; 28.118,35.208 28.346,35.437 v1(28.346,35.712) 28.346,41.732 v1(28.27,41.808) ; U6C.18@38.774,21.311 38.774,22.555 42.062,25.843 42.062,39.98 41.478,40.564 41.478,42.189 v1(41.504,42.215) ; v1(43.942,42.291) 44.232,42.581 U13.50@44.232,56.506 ; U6D.18@52.774,21.311 52.774,22.581 56.236,26.042 56.236,42.062 v1(56.185,42.113)
  MidLayer2 (*.G2) w0.127: v1(14.427,36.906) 17.297,36.906 17.805,37.414 22.53,37.414 v1(22.758,37.186) ; v1(22.733,35.712) v1(28.346,35.712) ; v1(28.27,41.808) 41.097,41.808 v1(41.504,42.215) 43.866,42.215 v1(43.942,42.291) 44.12,42.113 v1(56.185,42.113)
DIN_B: U6E.18 U6F.18 U6G.18 U6H.18 U13.70 | length 150.8
  Top Layer (*.GTL) w0.127: v1(54.229,46.965) 54.229,56.503 U13.70@54.232,56.506 ; U6E.18@66.774,21.311 66.774,22.581 70.231,26.037 70.231,42.475 70.244,42.488 70.244,46.926 v1(70.206,46.965) ; U6F.18@80.774,21.311 80.774,22.581 83.769,25.576 83.769,30.445 84.03,30.705 v1(84.03,39.116) ; U6G.18@94.774,21.311 95.084,21.62 95.084,22.214 95.449,22.58 96.044,22.58 97.561,24.098 97.561,27.959 97.358,28.162 97.358,31.057 97.561,31.26 v1(97.561,38.76) ; U6H.18@108.774,21.311 109.084,21.62 109.084,22.215 109.449,22.58 110.044,22.58 111.531,24.068 111.531,37.864 v1@110.613,38.782
  MidLayer2 (*.G2) w0.127: v1(54.229,46.965) v1(70.206,46.965) ; v1(70.206,39.116) v1(84.03,39.116) 84.385,38.76 v1(97.561,38.76) v1(110.592,38.76)
DOUT: U5.15 U6A.19 U6B.19 U6C.19 U6D.19 U6E.19 U6F.19 U6G.19 U6H.19 U13.51 | length 251.4
  Top Layer (*.GTL) w0.127: U6A.19@11.424,21.311 11.424,22.581 14.478,25.634 14.478,32.563 v1(14.681,32.563) ; U6B.19@25.424,21.311 25.424,22.53 28.372,25.478 28.372,27.884 28.55,28.062 v1@28.55,32.207 ; U6C.19@39.424,21.311 39.424,22.555 42.316,25.448 42.316,29.196 42.621,29.501 42.621,36.389 42.316,36.694 42.316,40.443 42.151,40.608 42.151,40.977 42.307,41.132 v1(41.986,41.453) ; U13.51@44.732,56.506 44.755,56.483 v1(44.755,41.504) ; U6D.19@53.424,21.311 53.424,22.581 56.49,25.646 56.49,31.953 56.947,32.41 v1(56.947,32.436) ; U6E.19@67.424,21.311 67.424,22.581 70.485,25.642 70.485,31.826 v1(70.917,32.258) ; U6F.19@81.424,21.311 81.424,22.581 84.252,25.408 84.252,30.288 84.607,30.644 v1(84.607,32.106) ; U6G.19@95.424,21.311 95.734,21.62 95.734,22.214 95.845,22.326 96.44,22.326 98.222,24.108 v1(98.222,32.106) ; U5.15@107.556,55.173 109.961,55.173 v1(109.982,55.194) ; U6H.19@109.424,21.311 109.734,21.62 109.734,22.215 109.845,22.326 110.44,22.326 112.116,24.002 v1@112.116,32.207
  MidLayer1 (*.G1) w0.127: v1(109.982,55.194) 110.49,55.194 112.154,53.53 112.154,32.271 v1(112.09,32.207)
  MidLayer2 (*.G2) w0.127: v1(14.681,32.563) 14.63,32.512 19.837,32.512 20.32,32.029 28.397,32.029 v1(28.575,32.207) 34.564,32.207 34.653,32.118 42.456,32.118 v1(42.596,32.258) 42.736,32.118 56.655,32.118 v1@56.959,32.423 ; v1(41.986,41.453) 44.704,41.453 v1(44.755,41.504) ; v1(56.947,32.436) 62.335,32.436 62.653,32.118 63.063,32.118 63.177,32.233 v1@70.917,32.233 ; v1(70.917,32.258) 71.057,32.118 84.595,32.118 v1(84.607,32.106) v1(98.222,32.106) 111.989,32.106 v1(112.09,32.207)
ENBA: U4.13 U7A.17 | length 26.9
  Top Layer (*.GTL) w0.254: U4.13@132.004,56.022 135.041,56.022 v1(135.433,56.413) ; U7A.17@132.525,34.348 132.525,36.414 v2(132.794,36.683)
  MidLayer1 (*.G1) w0.254: v2(132.794,36.683) 132.794,50.244 135.433,52.883 v1(135.433,56.413)
ENBB: U4.12 U7B.17 | length 35.8
  Top Layer (*.GTL) w0.254: U4.12@132.004,55.372 146.634,55.372 v1(146.736,55.27) ; U7B.17@146.525,34.348 146.525,36.414 v2(146.794,36.683)
  MidLayer1 (*.G1) w0.254: v1(146.736,55.27) 146.794,55.212 v2(146.794,36.683)
ENBC: U4.11 U7C.17 | length 49.2
  Top Layer (*.GTL) w0.254: U4.11@132.004,54.722 160.721,54.722 v1(160.757,54.686) ; U7C.17@160.525,34.348 160.525,36.414 v2(160.794,36.683)
  MidLayer1 (*.G1) w0.254: v1(160.757,54.686) 160.794,54.649 v2(160.794,36.683)
ENBD: U4.10 U7D.17 | length 61.4
  Top Layer (*.GTL) w0.254: U4.10@132.004,54.072 172.775,54.072 v1(172.847,54) ; U7D.17@174.525,34.348 174.525,36.414 v2(174.794,36.683)
  MidLayer1 (*.G1) w0.254: v1(172.847,54) 174.794,52.053 v2(174.794,36.683)
FORCE+A: C14A.2 R3A.2 U6A.9 | length 9.4
  Top Layer (*.GTL) w0.254: v2(2.616,23.393) v2@2.642,23.368 ; C14A.2@2.642,21.971 v2@2.642,23.368 ; U6A.9@6.874,26.861 6.874,25.34 4.902,23.368 v2@2.642,23.368
  Bottom Layer (*.GBL) w0.254: v2(2.616,23.393) 2.642,23.368 R3A.2@2.642,21.971
FORCE+B: C14B.2 R3B.2 U6B.9 | length 9.4
  Top Layer (*.GTL) w0.254: v2(16.616,23.393) v2@16.642,23.368 ; C14B.2@16.642,21.971 v2@16.642,23.368 ; U6B.9@20.874,26.861 20.874,25.34 18.902,23.368 v2@16.642,23.368
  Bottom Layer (*.GBL) w0.254: v2(16.616,23.393) 16.642,23.368 R3B.2@16.642,21.971
FORCE+C: C14C.2 R3C.2 U6C.9 | length 9.4
  Top Layer (*.GTL) w0.254: v2(30.616,23.393) v2@30.642,23.368 ; C14C.2@30.642,21.971 v2@30.642,23.368 ; U6C.9@34.874,26.861 34.874,25.34 32.902,23.368 v2@30.642,23.368
  Bottom Layer (*.GBL) w0.254: v2(30.616,23.393) 30.642,23.368 R3C.2@30.642,21.971
FORCE+D: C14D.2 R3D.2 U6D.9 | length 9.4
  Top Layer (*.GTL) w0.254: v2(44.616,23.393) v2@44.642,23.368 ; C14D.2@44.642,21.971 v2@44.642,23.368 ; U6D.9@48.874,26.861 48.874,25.34 46.902,23.368 v2@44.642,23.368
  Bottom Layer (*.GBL) w0.254: v2(44.616,23.393) 44.642,23.368 R3D.2@44.642,21.971
FORCE+E: C14E.2 R3E.2 U6E.9 | length 9.4
  Top Layer (*.GTL) w0.254: v2(58.616,23.393) v2@58.642,23.368 ; C14E.2@58.642,21.971 v2@58.642,23.368 ; U6E.9@62.874,26.861 62.874,25.34 60.902,23.368 v2@58.642,23.368
  Bottom Layer (*.GBL) w0.254: v2(58.616,23.393) 58.642,23.368 R3E.2@58.642,21.971
FORCE+F: C14F.2 R3F.2 U6F.9 | length 9.4
  Top Layer (*.GTL) w0.254: v2(72.616,23.393) v2@72.642,23.368 ; C14F.2@72.642,21.971 v2@72.642,23.368 ; U6F.9@76.874,26.861 76.874,25.34 74.902,23.368 v2@72.642,23.368
  Bottom Layer (*.GBL) w0.254: v2(72.616,23.393) 72.642,23.368 R3F.2@72.642,21.971
FORCE+G: C14G.2 R3G.2 U6G.9 | length 9.4
  Top Layer (*.GTL) w0.254: v2(86.616,23.393) v2@86.642,23.368 ; C14G.2@86.642,21.971 v2@86.642,23.368 ; U6G.9@90.874,26.861 90.874,25.34 88.902,23.368 v2@86.642,23.368
  Bottom Layer (*.GBL) w0.254: v2(86.616,23.393) 86.642,23.368 R3G.2@86.642,21.971
FORCE+H: C14H.2 R3H.2 U6H.9 | length 9.4
  Top Layer (*.GTL) w0.254: v2(100.616,23.393) v2@100.642,23.368 ; C14H.2@100.642,21.971 v2@100.642,23.368 ; U6H.9@104.874,26.861 104.874,25.34 102.902,23.368 v2@100.642,23.368
  Bottom Layer (*.GBL) w0.254: v2(100.616,23.393) 100.642,23.368 R3H.2@100.642,21.971
FORCE-A: J2A.4 R6A.2 TP6A.1 U6A.5 | length 22.5
  Top Layer (*.GTL) w0.254: TP6A.1@8.433,33.757 8.433,30.988 R6A.2@8.915,30.505 ; R6A.2@9.017,30.607 R6A.2@8.915,30.505 ; v2(9.474,25.222) U6A.5@9.474,26.861 9.474,29.947 R6A.2@8.915,30.505
  MidLayer1 (*.G1) w0.254: J2A.4@8.27,13.34 10.693,15.763 10.693,24.003 v2(9.474,25.222)
FORCE-B: J2B.4 R6B.2 TP6B.1 U6B.5 | length 22.5
  Top Layer (*.GTL) w0.254: TP6B.1@22.433,33.757 22.433,30.988 R6B.2@22.915,30.505 ; R6B.2@23.017,30.607 R6B.2@22.915,30.505 ; v2(23.474,25.222) U6B.5@23.474,26.861 23.474,29.947 R6B.2@22.915,30.505
  MidLayer1 (*.G1) w0.254: J2B.4@22.27,13.34 24.693,15.763 24.693,24.003 v2(23.474,25.222)
FORCE-C: J2C.4 R6C.2 TP6C.1 U6C.5 | length 22.5
  Top Layer (*.GTL) w0.254: TP6C.1@36.433,33.757 36.433,30.988 R6C.2@36.915,30.505 ; R6C.2@37.017,30.607 R6C.2@36.915,30.505 ; v2(37.474,25.222) U6C.5@37.474,26.861 37.474,29.947 R6C.2@36.915,30.505
  MidLayer1 (*.G1) w0.254: J2C.4@36.27,13.34 38.693,15.763 38.693,24.003 v2(37.474,25.222)
FORCE-D: J2D.4 R6D.2 TP6D.1 U6D.5 | length 22.5
  Top Layer (*.GTL) w0.254: TP6D.1@50.433,33.757 50.433,30.988 R6D.2@50.915,30.505 ; R6D.2@51.017,30.607 R6D.2@50.915,30.505 ; v2(51.474,25.222) U6D.5@51.474,26.861 51.474,29.947 R6D.2@50.915,30.505
  MidLayer1 (*.G1) w0.254: J2D.4@50.27,13.34 52.693,15.763 52.693,24.003 v2(51.474,25.222)
FORCE-E: J2E.4 R6E.2 TP6E.1 U6E.5 | length 22.5
  Top Layer (*.GTL) w0.254: TP6E.1@64.433,33.757 64.433,30.988 R6E.2@64.915,30.505 ; R6E.2@65.017,30.607 R6E.2@64.915,30.505 ; v2(65.474,25.222) U6E.5@65.474,26.861 65.474,29.947 R6E.2@64.915,30.505
  MidLayer1 (*.G1) w0.254: J2E.4@64.27,13.34 66.693,15.763 66.693,24.003 v2(65.474,25.222)
FORCE-F: J2F.4 R6F.2 TP6F.1 U6F.5 | length 22.5
  Top Layer (*.GTL) w0.254: TP6F.1@78.433,33.757 78.433,30.988 R6F.2@78.915,30.505 ; R6F.2@79.017,30.607 R6F.2@78.915,30.505 ; v2(79.474,25.222) U6F.5@79.474,26.861 79.474,29.947 R6F.2@78.915,30.505
  MidLayer1 (*.G1) w0.254: J2F.4@78.27,13.34 80.693,15.763 80.693,24.003 v2(79.474,25.222)
FORCE-G: J2G.4 R6G.2 TP6G.1 U6G.5 | length 22.5
  Top Layer (*.GTL) w0.254: TP6G.1@92.433,33.757 92.433,30.988 R6G.2@92.915,30.505 ; R6G.2@93.017,30.607 R6G.2@92.915,30.505 ; v1@93.474,25.273 93.474,29.947 R6G.2@92.915,30.505
  MidLayer1 (*.G1) w0.254: J2G.4@92.27,13.34 94.693,15.763 94.693,24.001 v1(93.421,25.273)
FORCE-H: J2H.4 R6H.2 TP6H.1 U6H.5 | length 22.3
  Top Layer (*.GTL) w0.127: R6H.2@106.915,30.505 107.474,29.947 U6H.5@107.474,26.861
  Top Layer (*.GTL) w0.254: TP6H.1@106.433,33.757 106.433,30.988 R6H.2@106.915,30.505 ; U6H.5@107.474,26.861 107.493,26.842 v1(107.493,25.4)
  MidLayer1 (*.G1) w0.254: J2H.4@106.27,13.34 106.304,13.34 108.56,15.596 108.56,24.282 107.493,25.349 v1(107.493,25.4)
GP_I/OSPARE10: J1.S18 U13.18 | length 62.9
  Top Layer (*.GTL) w0.127: J1.S18@-5.95,37.175 0.853,37.175 3.531,39.853 9.108,39.853 18.887,49.632 23.687,49.632 27.051,52.995 27.051,56.185 27.064,56.197 27.064,59.258 27.153,59.347 v1(27.153,67.386) ; v1(34.341,67.158) 34.489,67.306 U13.18@35.932,67.306
  MidLayer2 (*.G2) w0.127: v1(27.153,67.386) 27.381,67.158 v1(34.341,67.158)
GP_I/OSPARE11: U13.62
GP_I/OSPARE12: J1.S20 U13.13 | length 65.4
  Top Layer (*.GTL) w0.127: J1.S20@-5.95,39.715 0.574,39.715 3.175,42.316 10.134,42.316 18.466,50.648 23.266,50.648 24.93,52.311 24.93,59.258 24.308,59.88 v1(24.308,69.698) ; v1(33.35,69.723) 33.433,69.806 U13.13@35.932,69.806
  MidLayer2 (*.G2) w0.127: v1(24.308,69.698) 33.325,69.698 v1(33.35,69.723)
GP_I/OSPARE14: J1.S17 U13.6 | length 68.8
  Top Layer (*.GTL) w0.127: J1.S17@-5.95,35.905 0.676,35.905 3.302,38.532 8.505,38.532 19.097,49.124 23.898,49.124 27.559,52.785 27.559,55.296 28.13,55.867 28.13,59.258 28.575,59.703 v1(28.575,73.254) ; v1(34.061,73.279) 34.088,73.306 U13.6@35.932,73.306
  MidLayer2 (*.G2) w0.127: v1(28.575,73.254) 28.6,73.279 v1(34.061,73.279)
I2C_SCL: J1.S22 U13.29 | length 57.8
  Top Layer (*.GTL) w0.127: J1.S22@-5.95,42.255 0.98,42.255 2.972,44.247 10.628,44.247 18.045,51.664 22.845,51.664 23.825,52.643 23.825,56.49 23.33,56.985 23.33,59.258 22.174,60.414 v1@22.174,61.849 ; v1(34.696,61.824) 34.714,61.806 U13.29@35.932,61.806
  MidLayer2 (*.G2) w0.127: v1(22.123,61.849) 22.149,61.824 v1(34.696,61.824)